# EAGLE board Controller-Board_Rack-PDU_1.0 (EAGLE 9.6.2), part 1 of 2
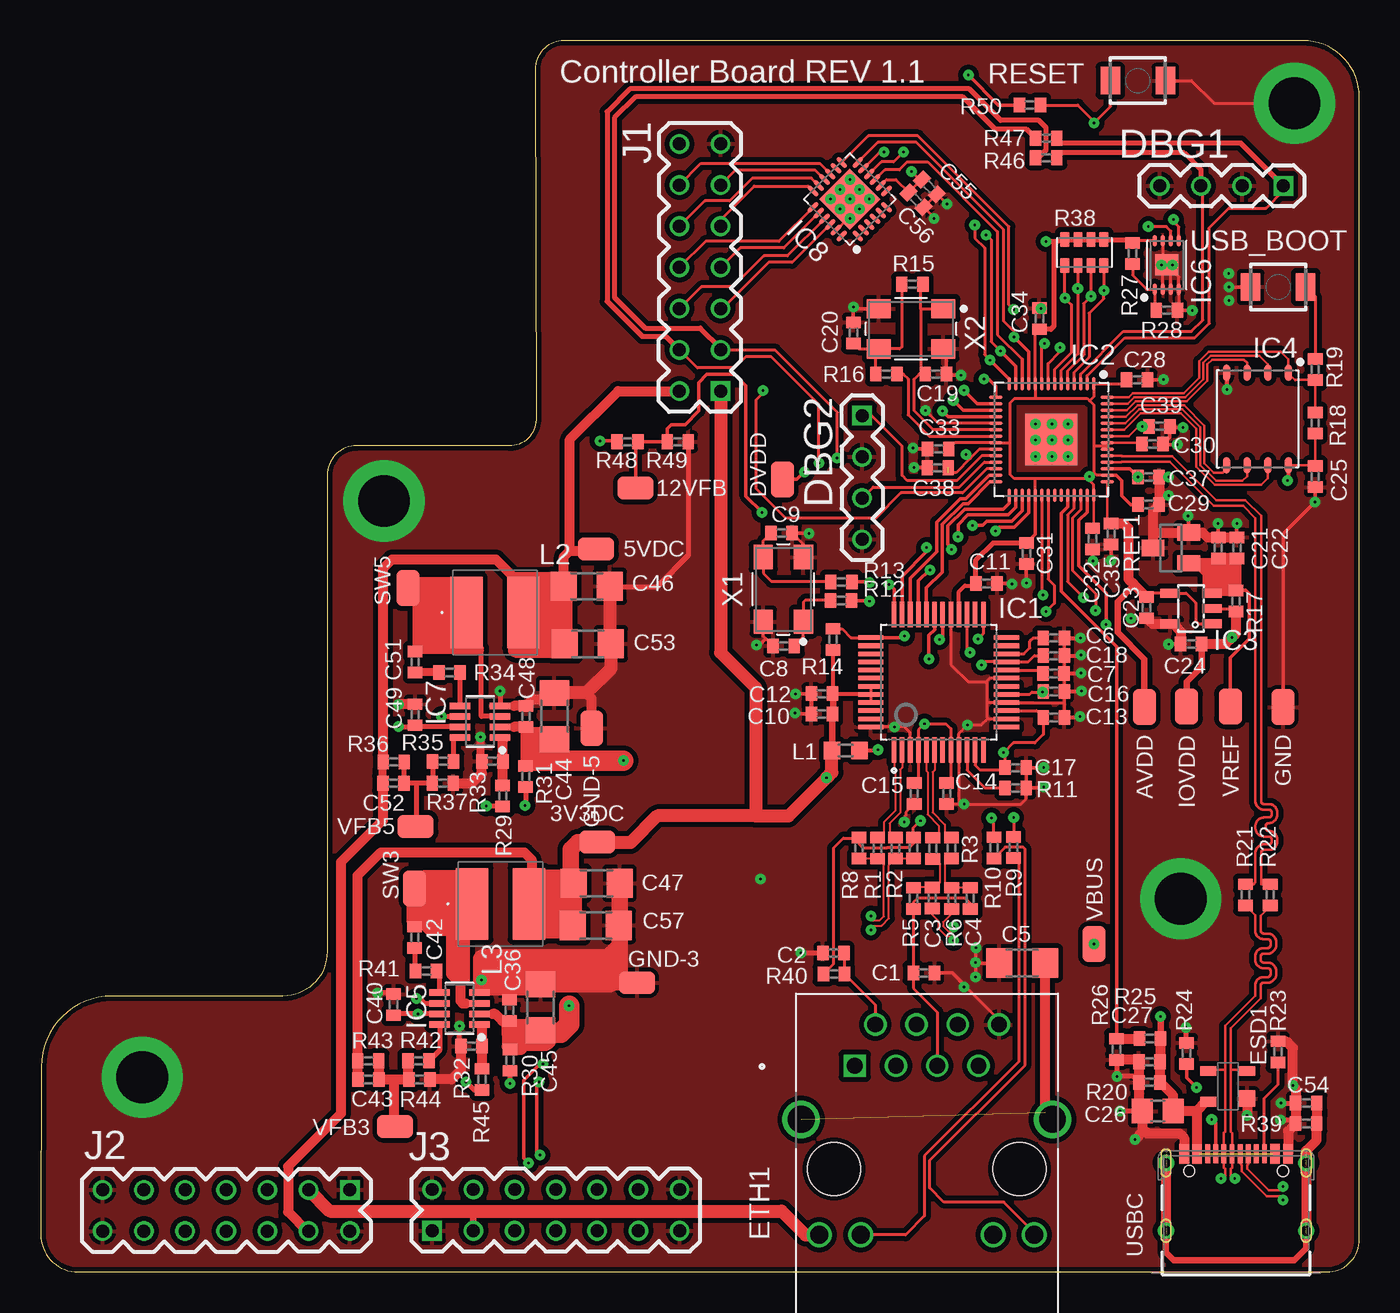
[diagram p0: board, top side]
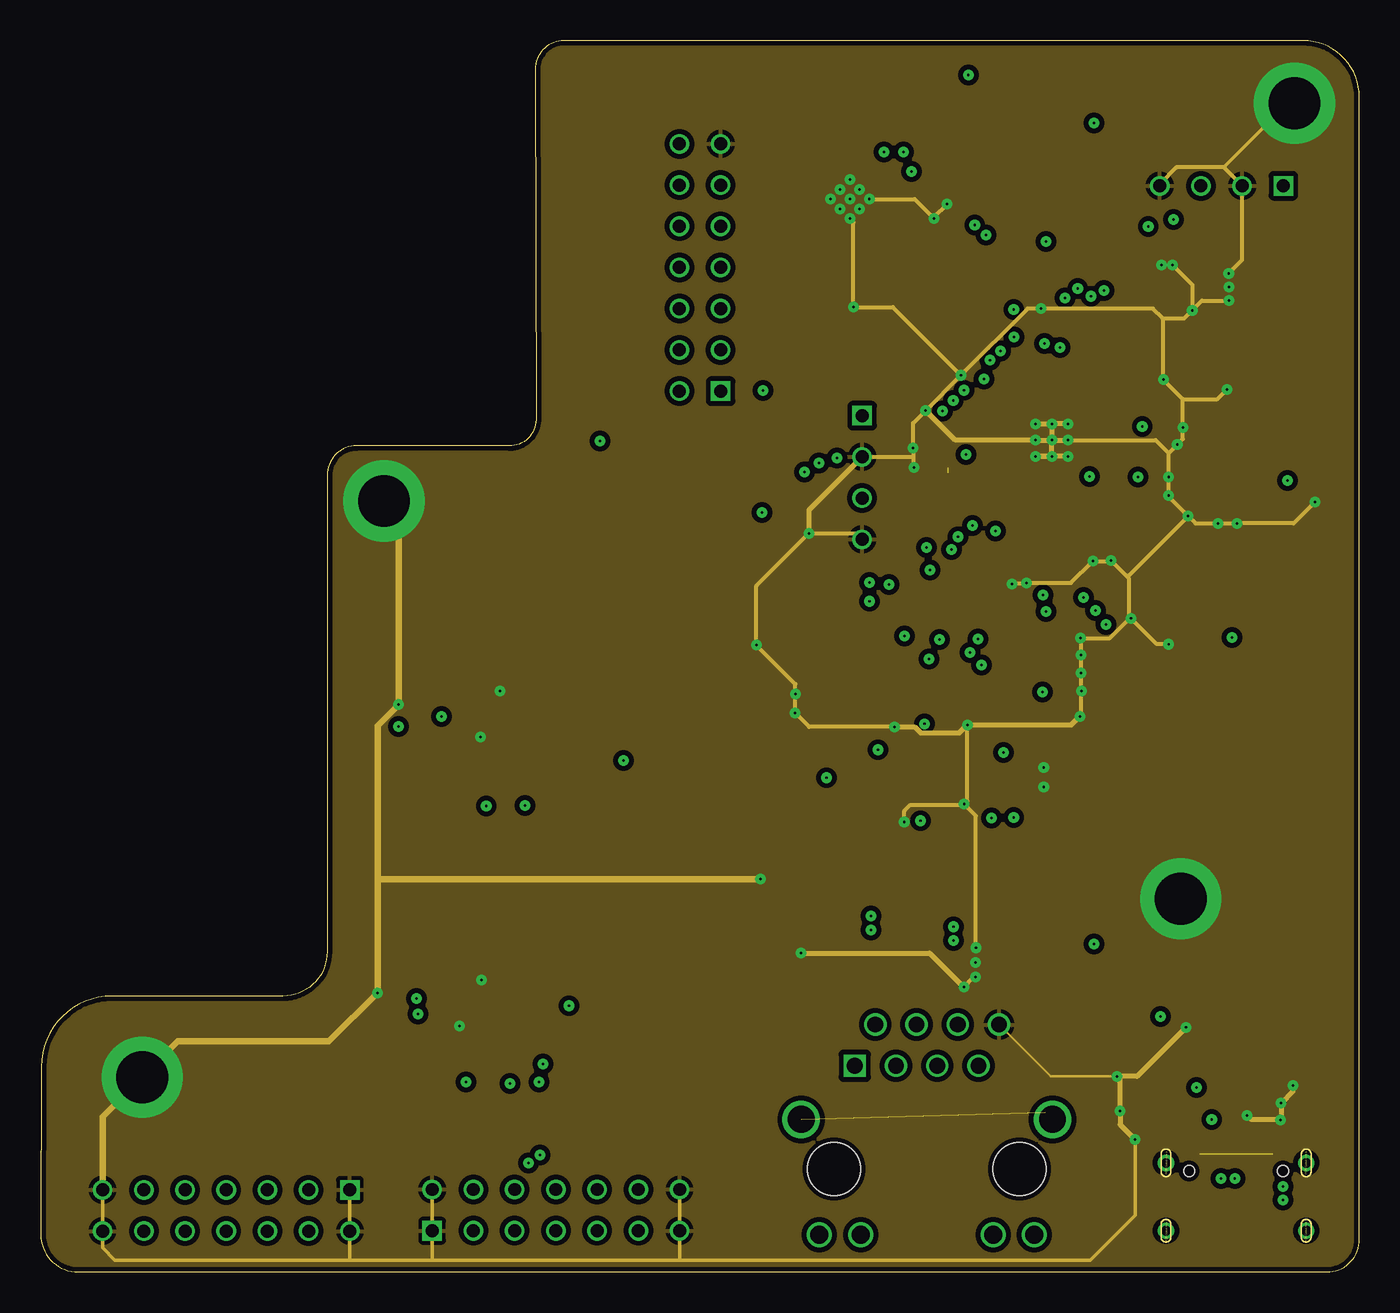
[diagram p1: board, inner layer Route2]
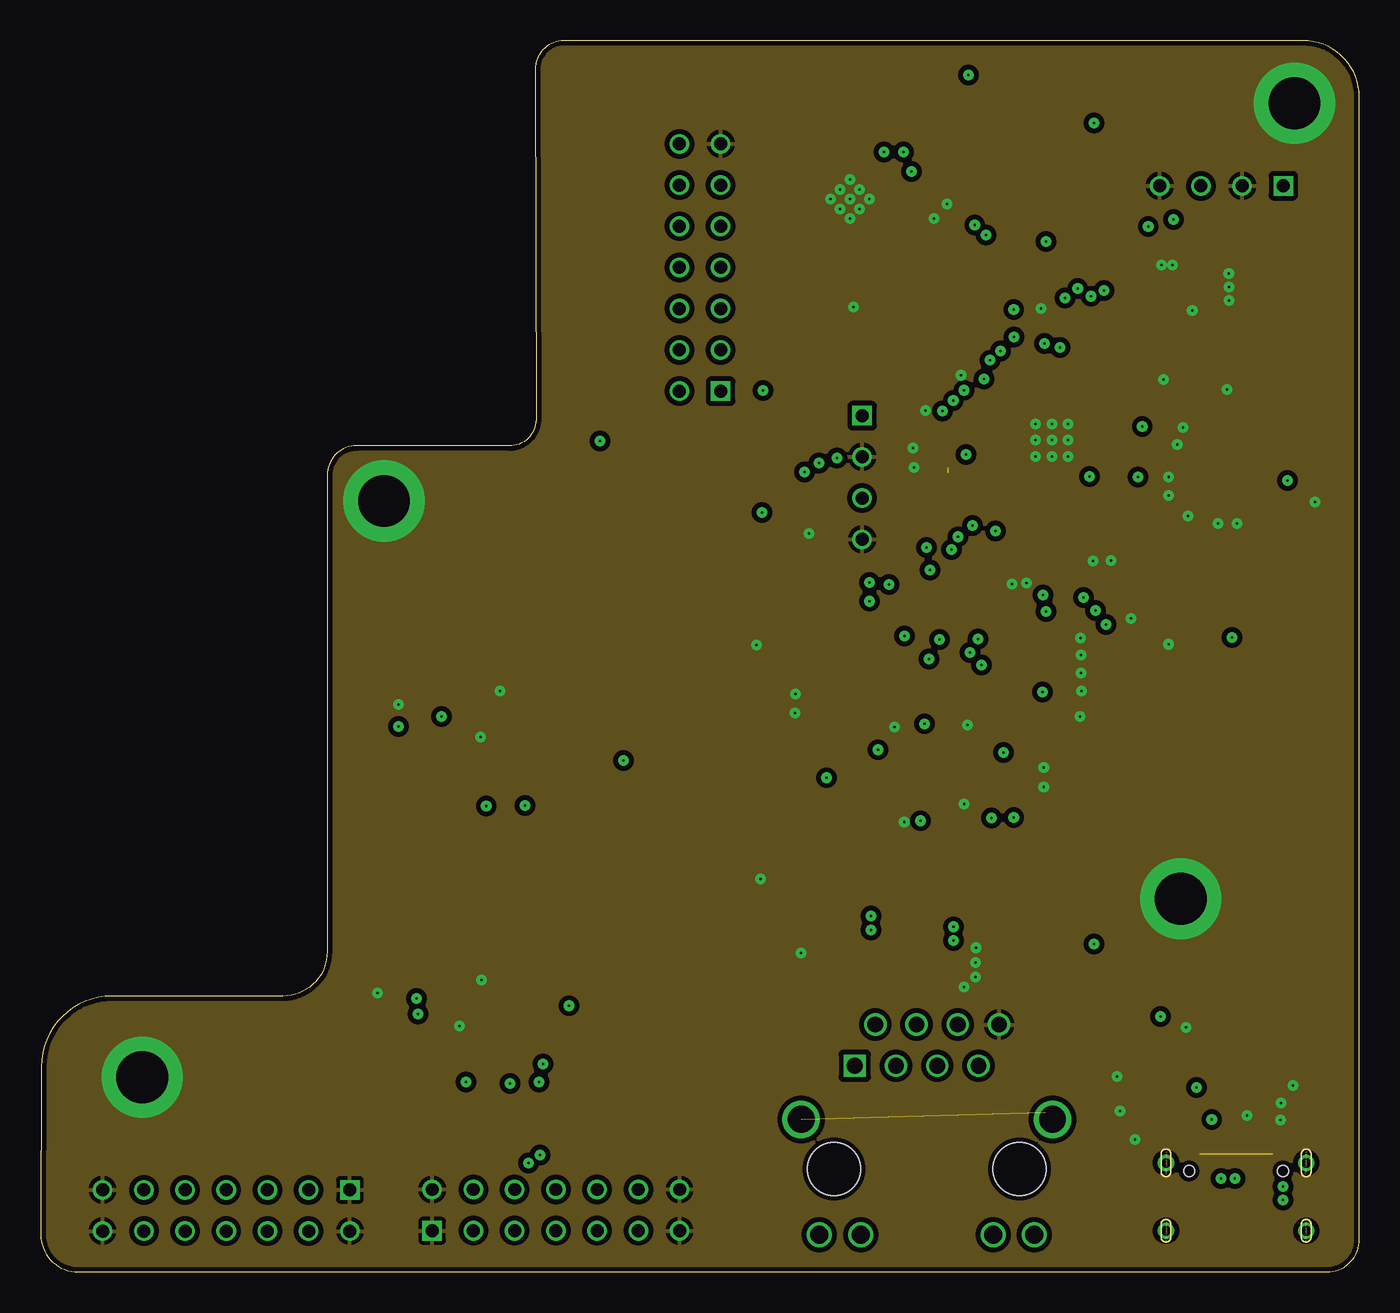
[diagram p2: board, inner layer Route15]
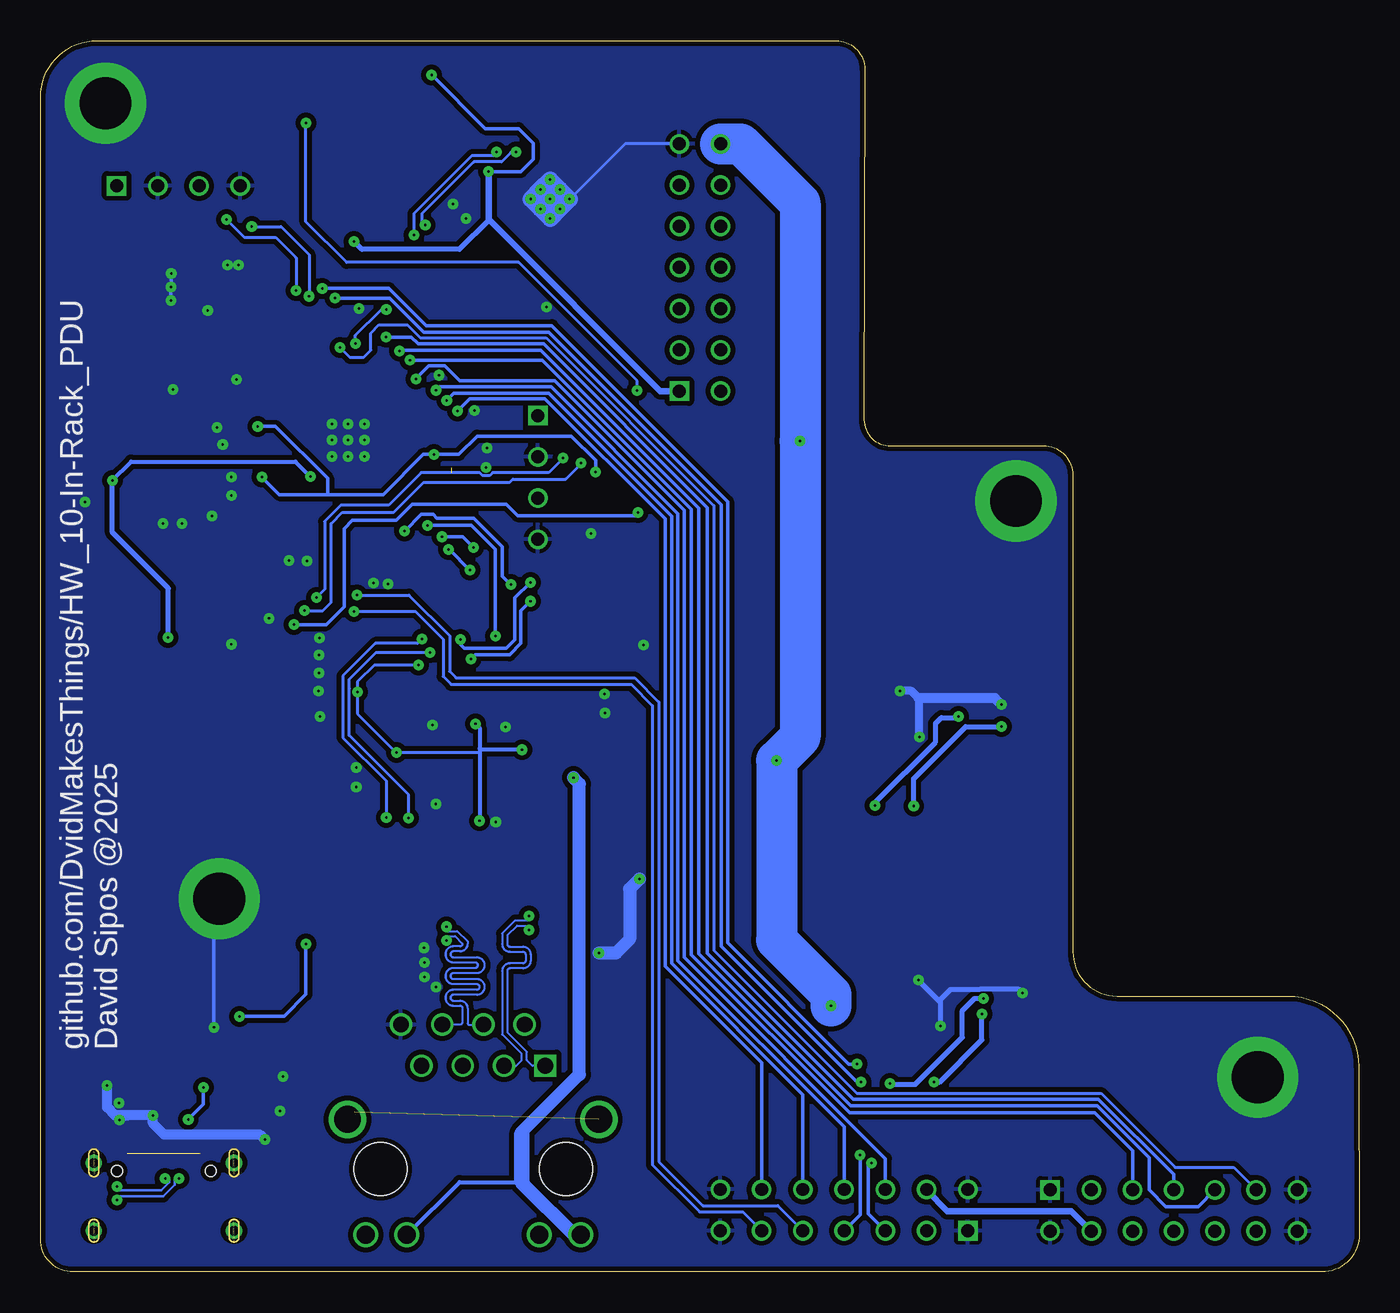
[diagram p3: board, bottom side, seen from below]

Size 81.26 x 75.87 mm. Coordinates in mm from the lower left corner, seen from the top.
Outline: 19.46,50.9 arc90 17.66,49.09 17.66,19.73 arc-90 14.93,17 4.41,17 arc90 0.05,12.65 0.01,2.31 0,2.31 arc90 2.31,0 79.26,0 arc90 81.26,2 81.26,72.39 arc90 77.78,75.87 32.24,75.87 arc90 30.48,74.11 30.53,52.5 arc-90 28.88,50.9 19.46,50.9
Copper layers (1+2*15+16): Top 0.035mm / dielectric 0.15mm / Route2 0.0175mm / dielectric 1.265mm / Route15 0.0175mm / dielectric 0.15mm / Bottom 0.035mm
Design rules "4layers *": minimum track width 3.5mil, minimum drill 0.15mm, track to track 3.5mil, track to pad 3.5mil, pad to pad 3.5mil, via to via 3.5mil, smd to smd 3.5mil, copper to edge 0.2mm, drill to drill 6mil, minimum pad ring 8mil, minimum via ring 0.25mm, stop-mask expansion 0.05mm, vias tented up to drill 16mil, thermal gap 10mil
Net classes: 1 100R_DIFFPAIR: width 0.121 mm, drill 0.15 mm, clearance 0.191 mm; 2 90R_DIFFPAIR: width 0.155 mm, drill 0.15 mm, clearance 0.191 mm

## Footprints (pad centres in the part's own frame; a part is rotated, then mirrored left to right if it is on the bottom)
TP = smd 2.2 x 1.4: TP 0,0
C0402 = smd 0.7 x 0.9: 1 -0.65,0; 2 0.65,0
C1206 = smd 1.6 x 1.803: 1 -1.422,0; 2 1.422,0
0805 = smd 1.3 x 1.5: 1 -0.95,0; 2 0.95,0
0402 = smd 0.7 x 0.9: 1 -0.65,0; 2 0.65,0
1X4 = drill 0.8 square: 1 0,3.81 | drill 0.8: 2 0,1.27; 3 0,-1.27; 4 0,-3.81
SOT143 = smd 1 x 1: 1 -0.75,-1.2 | smd 0.6 x 1: 2 0.95,-1.2; 3 0.95,1.2; 4 -0.95,1.2
RJ45-CAT5 = drill 0.97 square: 1 -4.445,6.35 | drill 0.97: 2 -3.175,8.89; 3 -1.905,6.35; 4 -0.635,8.89; 5 0.635,6.35; 6 1.905,8.89; 7 3.175,6.35; 8 4.445,8.89 | drill 1.1: 9 -6.625,-4.06; 10 -4.085,-4.06; 11 4.085,-4.06; 12 6.625,-4.06 | drill 1.65: S1 -7.745,3.05; S2 7.745,3.05 | hole 3.25: 5.715,0; -5.715,0
LQFP48 = smd 1.56 x 0.28: 1 -4.18,2.75; 2 -4.18,2.25; 3 -4.18,1.75; 4 -4.18,1.25; 5 -4.18,0.75; 6 -4.18,0.25; 7 -4.18,-0.25; 8 -4.18,-0.75; 9 -4.18,-1.25; 10 -4.18,-1.75; 11 -4.18,-2.25; 12 -4.18,-2.75; 25 4.18,-2.75; 26 4.18,-2.25; 27 4.18,-1.75; 28 4.18,-1.25; 29 4.18,-0.75; 30 4.18,-0.25; 31 4.18,0.25; 32 4.18,0.75; 33 4.18,1.25; 34 4.18,1.75; 35 4.18,2.25; 36 4.18,2.75 | smd 0.28 x 1.56: 13 -2.75,-4.18; 14 -2.25,-4.18; 15 -1.75,-4.18; 16 -1.25,-4.18; 17 -0.75,-4.18; 18 -0.25,-4.18; 19 0.25,-4.18; 20 0.75,-4.18; 21 1.25,-4.18; 22 1.75,-4.18; 23 2.25,-4.18; 24 2.75,-4.18; 37 2.75,4.18; 38 2.25,4.18; 39 1.75,4.18; 40 1.25,4.18; 41 0.75,4.18; 42 0.25,4.18; 43 -0.25,4.18; 44 -0.75,4.18; 45 -1.25,4.18; 46 -1.75,4.18; 47 -2.25,4.18; 48 -2.75,4.18
QFN40P700X700X100-57T510 = smd 0.837 x 0.22: 1 -3.437,2.6; 2 -3.437,2.2; 3 -3.437,1.8; 4 -3.437,1.4; 5 -3.437,1; 6 -3.437,0.6; 7 -3.437,0.2; 8 -3.437,-0.2; 9 -3.437,-0.6; 10 -3.437,-1; 11 -3.437,-1.4; 12 -3.437,-1.8; 13 -3.437,-2.2; 14 -3.437,-2.6; 29 3.437,-2.6; 30 3.437,-2.2; 31 3.437,-1.8; 32 3.437,-1.4; 33 3.437,-1; 34 3.437,-0.6; 35 3.437,-0.2; 36 3.437,0.2; 37 3.437,0.6; 38 3.437,1; 39 3.437,1.4; 40 3.437,1.8; 41 3.437,2.2; 42 3.437,2.6 | smd 0.22 x 0.837: 15 -2.6,-3.437; 16 -2.2,-3.437; 17 -1.8,-3.437; 18 -1.4,-3.437; 19 -1,-3.437; 20 -0.6,-3.437; 21 -0.2,-3.437; 22 0.2,-3.437; 23 0.6,-3.437; 24 1,-3.437; 25 1.4,-3.437; 26 1.8,-3.437; 27 2.2,-3.437; 28 2.6,-3.437; 43 2.6,3.437; 44 2.2,3.437; 45 1.8,3.437; 46 1.4,3.437; 47 1,3.437; 48 0.6,3.437; 49 0.2,3.437; 50 -0.2,3.437; 51 -0.6,3.437; 52 -1,3.437; 53 -1.4,3.437; 54 -1.8,3.437; 55 -2.2,3.437; 56 -2.6,3.437 | smd 3.2 x 3.2: 57 0,0
SOT23-5 = smd 0.55 x 1.2: 1 -0.95,-1.3; 2 0,-1.3; 3 0.95,-1.3; 4 0.95,1.3; 5 -0.95,1.3
SON127P600X500X75-8N = smd 1.012 x 0.432: 1 -2.85,1.905; 2 -2.85,0.635; 3 -2.85,-0.635; 4 -2.85,-1.905; 5 2.85,-1.905; 6 2.85,-0.635; 7 2.85,0.635; 8 2.85,1.905
SOT65P280X110-8N = smd 1.259 x 0.4: 1 -1.228,0.975; 2 -1.228,0.325; 3 -1.228,-0.325; 4 -1.228,-0.975; 5 1.228,-0.975; 6 1.228,-0.325; 7 1.228,0.325; 8 1.228,0.975
SON50P300X200X50-9T130X140N = smd 0.711 x 0.27: 1 -1.501,0.75; 2 -1.501,0.25; 3 -1.501,-0.25; 4 -1.501,-0.75; 5 1.501,-0.75; 6 1.501,-0.25; 7 1.501,0.25; 8 1.501,0.75 | smd 1.3 x 1.4: 9 0,0
QFN50P400X400X100-25T265 = smd 0.811 x 0.264: 1 -1.951,1.25; 2 -1.951,0.75; 3 -1.951,0.25; 4 -1.951,-0.25; 5 -1.951,-0.75; 6 -1.951,-1.25; 13 1.951,-1.25; 14 1.951,-0.75; 15 1.951,-0.25; 16 1.951,0.25; 17 1.951,0.75; 18 1.951,1.25 | smd 0.264 x 0.811: 7 -1.25,-1.951; 8 -0.75,-1.951; 9 -0.25,-1.951; 10 0.25,-1.951; 11 0.75,-1.951; 12 1.25,-1.951; 19 1.25,1.951; 20 0.75,1.951; 21 0.25,1.951; 22 -0.25,1.951; 23 -0.75,1.951; 24 -1.25,1.951 | smd 2.65 x 2.65: 25 0,0
2X7 = drill 0.8 square: 1 -1.27,7.62 | drill 0.8: 2 1.27,7.62; 3 -1.27,5.08; 4 1.27,5.08; 5 -1.27,2.54; 6 1.27,2.54; 7 -1.27,0; 8 1.27,0; 9 -1.27,-2.54; 10 1.27,-2.54; 11 -1.27,-5.08; 12 1.27,-5.08; 13 -1.27,-7.62; 14 1.27,-7.62
0603 = smd 1 x 1.1: 1 -0.85,0; 2 0.85,0
SRR5228A = smd 4.4 x 2: 1 0,1.75; 2 0,-1.75
742C083103JP = smd 0.59 x 0.92: 1 -1.2,-0.8; 2 -0.4,-0.8; 3 0.4,-0.8; 4 1.2,-0.8; 5 1.2,0.8; 6 0.4,0.8; 7 -0.4,0.8; 8 -1.2,0.8
SOT23 = smd 1 x 1.4: 1 -0.95,-1.1; 2 0.95,-1.1; 3 0,1.1
SWITCH-OMRON_B3U-1000P = smd 1.2 x 1.7: 1 -1.7,0; 2 1.7,0
629722000214 = smd 0.3 x 1.15: A1 -3.35,4.745; A4 -2.55,4.745; A5 -1.25,4.745; A6 -0.25,4.745; A7 0.25,4.745; A8 1.25,4.745; A9 2.55,4.745; A12 3.35,4.745; B1 3.05,4.745; B4 2.25,4.745; B5 1.75,4.745; B6 0.75,4.745; B7 -0.75,4.745; B8 -1.75,4.745; B9 -2.25,4.745; B12 -3.05,4.745 | drill 0.6 pad 1: S1 -4.32,4.18; S2 4.32,4.18; S3 -4.32,0; S4 4.32,0 | hole 0.65: -2.89,3.68; 2.89,3.68
OSCCC500X320X130 = smd 1.487 x 1.187: 1 -1.988,-1.238; 2 1.988,-1.238; 3 1.988,1.238; 4 -1.988,1.238

## Placement (x,y rotation side)
3V3DC  TP  [TP]  34.3,26.49 180 top
5VDC  TP  [TP]  34.23,44.55 0 top
12VFB  TP  [TP]  36.66,48.3 0 top
AVDD  TP  [TP]  68.01,34.81 270 top
C1  100nF  [C0402]  54.43,18.42 0 top
C2  22nF  [C0402]  48.85,19.64 180 top
C3  6.8nF  [C0402]  54.94,23.04 270 top
C4  6.8nF  [C0402]  56.14,23.02 270 top
C5  C1206C102KGRACTM  [C1206]  60.48,19.03 0 top
C6  100nF  [C0402]  62.43,39.07 0 top
C7  4.7uF  [C0402]  62.41,36.88 0 top
C8  18pF  [C0402]  45.78,38.57 180 top
C9  18pF  [C0402]  45.65,45.53 0 top
C10  100nF  [C0402]  48.14,34.38 180 top
C11  100nF  [C0402]  58.28,42.42 0 top
C12  100nF  [C0402]  48.14,35.63 180 top
C13  100nF  [C0402]  62.43,34.17 0 top
C14  100nF  [C0402]  55.83,29.48 270 top
C15  100nF  [C0402]  53.83,29.48 270 top
C16  100nF  [C0402]  62.43,35.77 0 top
C17  100nF  [C0402]  60.08,31.07 0 top
C18  100nF  [C0402]  62.43,37.97 0 top
C19  15pF  [C0402]  55.16,55.32 0 top
C20  15pF  [C0402]  50.08,57.86 90 top
C21  1uF  [C0402]  72.57,44.61 90 top
C22  100nF  [C0402]  73.71,44.61 90 top
C23  100nF  [C0402]  68.15,40.93 270 top
C24  100nF  [C0402]  70.89,38.69 180 top
C25  100nF  [C0402]  78.54,49 270 top
C26  10uF  [0805]  68.83,9.91 180 top
C27  100nF  [0402]  68.33,12.95 180 top
C28  100nF  [C0402]  67.56,54.97 0 top
C29  100nF  [C0402]  68.27,47.28 0 top
C30  100nF  [C0402]  68.5,51.01 0 top
C31  100nF  [C0402]  60.74,44.27 270 top
C32  100nF  [C0402]  64.82,45.17 270 top
C33  100nF  [C0402]  55.3,50.72 180 top
C34  100nF  [C0402]  61.54,58.73 90 top
C35  100nF  [C0402]  65.96,45.47 270 top
C36  100nF  [0402]  28.9,16.12 90 top
C37  100nF  [C0402]  68.27,48.98 0 top
C38  100nF  [C0402]  55.28,49.55 180 top
C39  100nF  [C0402]  68.93,52.1 0 top
C40  100nF  [0402]  21.75,16.47 90 top
C42  100nF  [0402]  23.05,20.62 90 top
C43  33pF  [0402]  20.2,11.86 0 top
C44  CL31A226KAHNNNE - 22uF 25V  [C1206]  31.66,34.25 90 top
C45  CL31A226KAHNNNE - 22uF 25V  [C1206]  30.81,16.3 90 top
C46  CL31A226KPHNNNE - 22uF - 10V  [C1206]  33.66,42.25 0 top
C47  CL31A226KPHNNNE - 22uF - 10V  [C1206]  34.26,23.95 0 top
C48  100nF  [0402]  29.91,34.23 90 top
C49  100nF  [0402]  23.08,34.33 90 top
C51  100nF  [0402]  23.08,37.58 90 top
C52  33pF  [0402]  21.74,30.11 0 top
C53  CL31A226KPHNNNE - 22uF - 10V  [C1206]  33.71,38.7 0 top
C54  4.7nF  [0402]  77.98,10.41 180 top
C55  100nF  [C0402]  54.76,66.86 315 top
C56  100nF  [C0402]  53.94,66.06 315 top
C57  CL31A226KPHNNNE - 22uF - 10V  [C1206]  34.21,21.35 0 top
DBG1  [1X4]  72.77,66.92 270 top
DBG2  [1X4]  50.62,48.95 0 top
DVDD  TP  [TP]  45.71,48.83 90 top
ESD1  SP0503BAHTG-ES  [SOT143]  73.15,11.43 90 top
ETH1  SI-60118-F  [RJ45-CAT5]  54.61,6.35 0 top
GND  TP  [TP]  76.56,34.8 270 top
GND-3  TP  [TP]  36.75,17.82 180 top
GND-5  TP  [TP]  33.96,33.5 270 top
IC1  W5500  [LQFP48]  55.33,36.33 90 top
IC2  RP2040  [QFN40P700X700X100-57T510]  62.28,51.29 270 top
IC3  MCP6001R  [SOT23-5]  70.89,40.88 90 top
IC4  W25Q128JVPIQ  [SON127P600X500X75-8N]  74.98,52.56 270 top
IC5  MP2315S  [SOT65P280X110-8N]  25.81,16.23 180 top
IC6  CAT24C256HU4IGT3  [SON50P300X200X50-9T130X140N]  69.39,62.05 90 top
IC7  MP2315GJ-Z  [SOT65P280X110-8N]  27.08,33.91 180 top
IC8  MCP23S18-E/MJ  [QFN50P400X400X100-25T265]  49.86,66.1 135 top
IOVDD  TP  [TP]  70.61,34.85 270 top
J1  [2X7]  40.63,61.89 180 top
J2  [2X7]  11.44,3.79 270 top
J3  [2X7]  31.75,3.81 90 top
L1  BLM18EG221TN1D  [0603]  49.61,32.13 0 top
L2  4.9uH  [SRR5228A]  27.99,40.63 90 top
L3  4.2uH  [SRR5228A]  28.34,22.68 90 top
R1  3.3R  [0402]  51.57,26.11 270 top
R2  3.3R  [0402]  52.67,26.11 270 top
R3  3.3R  [0402]  56.12,26.12 270 top
R4  3.3R  [0402]  54.97,26.1 270 top
R5  49.9R  [C0402]  53.78,23.02 90 top
R6  49.9R  [C0402]  57.28,23.02 90 top
R7  49.9R  [0402]  53.78,26.12 90 top
R8  49.9R  [0402]  50.43,26.12 90 top
R9  470R  [0402]  59.94,26.16 270 top
R10  470R  [0402]  58.74,26.14 270 top
R11  12.4K 1%  [0402]  60.08,29.82 180 top
R12  0R  [0402]  49.32,41.37 0 top
R13  1M  [0402]  49.34,42.52 0 top
R14  4.7K  [0402]  48.82,38.98 270 top
R15  0R  [0402]  53.71,60.85 180 top
R16  1K  [0402]  52.11,55.32 0 top
R17  4.7K  [0402]  73.66,41.33 270 top
R18  DNI  [0402]  78.54,52.31 270 top
R19  1K  [0402]  78.54,55.61 270 top
R20  2.2K 1%  [0402]  68.33,11.68 180 top
R21  27R  [0402]  74.24,23.24 90 top
R22  27R  [0402]  75.76,23.24 90 top
R23  5.1K  [0402]  76.25,13.56 90 top
R24  5.1K  [0402]  70.61,13.46 90 top
R25  10K  [0402]  68.35,14.38 180 top
R26  10K  [0402]  66.29,13.72 270 top
R27  4.7K  [0402]  67.28,62.76 90 top
R28  4.7K  [0402]  69.39,59.25 180 top
R29  100K  [0402]  28.47,29.33 90 top
R30  499K  [0402]  28.92,13.05 270 top
R31  499K  [0402]  29.89,30.53 270 top
R32  7.5K  [0402]  26.55,13.91 180 top
R33  9.09K  [0402]  27.84,31.46 180 top
R34  10R  [0402]  25.2,36.94 0 top
R35  20K  [0402]  24.8,31.46 180 top
R36  40.2K  [0402]  21.76,31.43 0 top
R37  7.5K  [0402]  24.78,30.11 0 top
R38  4D03WGJ0332T5E  [742C083103JP]  64.31,62.81 0 top
R39  1M  [0402]  77.98,9.14 180 top
R40  470R  [0402]  48.88,18.35 180 top
R41  10R  [0402]  23.75,18.54 0 top
R42  33K  [0402]  23.29,13.01 180 top
R43  40.2K  [0402]  20.19,13.01 0 top
R44  12.7K  [0402]  23.34,11.86 0 top
R45  100K  [0402]  27.2,11.87 90 top
R46  0R  [0402]  61.96,68.65 0 top
R47  0R  [0402]  61.96,69.85 0 top
R48  100K  [0402]  36.16,51.15 180 top
R49  10K  [0402]  39.26,51.15 180 top
R50  10K  [0402]  60.96,71.9 0 top
REF1  LM4040BXX  [SOT23]  69.65,44.61 90 top
RESET  B3U-1000P-B  [SWITCH-OMRON_B3U-1000P]  67.61,73.4 0 top
SW3  TP  [TP]  23.04,23.63 90 top
SW5  TP  [TP]  22.63,42.13 90 top
USB_BOOT  B3U-1000P-B  [SWITCH-OMRON_B3U-1000P]  76.25,60.69 180 top
USBC  USB-TYPE-C-018  [629722000214]  73.66,2.54 0 top
VBUS  TP  [TP]  64.91,20.21 90 top
VFB3  TP  [TP]  21.84,8.96 0 top
VFB5  TP  [TP]  23.11,27.45 180 top
VREF  TP  [TP]  73.31,34.85 270 top
X1  XC53M4-25.000-F18NJDTL  [OSCCC500X320X130]  45.76,42.06 90 top
X2  K5A1200015304P  [OSCCC500X320X130]  53.64,58.11 180 top

## Library data of the parts
3V3DC 5VDC 12VFB AVDD C1-C40 C42-C49 C51-C57 DVDD GND GND-3 GND-5 IOVDD L1-L3 R1-R37 R39-R50 SW3 SW5 VBUS VFB3 VFB5 VREF X1 X2 = ds_passive
DBG1 DBG2 J1-J3 = ds_con
ESD1 IC1 IC8 = ds_ic_peripherals
ETH1 = ds_con; MANUFACTURER: Bel Fuse; MAXIMUM_PACKAGE_HEIGHT: 15.21mm; PARTREV: A0; STANDARD: Manufacturer Recommendations
IC2 = ds_ic_mcu
IC3 = ds_ic_opa
IC4 = MCU
IC5 IC7 REF1 = ds_ic_vreg
IC6 = ds_ic_memory
R38 = Resistor Array; CREATED_BY: PCBLayout.com; DIGIKEY_PN: 742C083103JPTR-ND; MANUFACTURER: CTS Resistor Products; MPN: 742C083103JP; PACKAGE: 1206
RESET USB_BOOT = 52101-101-REV-A_v16
USBC = Wurth_Connectors_WR-USB; APPLICATION: USB 2.0; DATASHEET-URL: https://www.we-online.com/redexpert/spec/629722000214?ae; GERDER: Receptacle; INTERFACE-TYPE: Type C; IR: 5A; MOUNT: SMT; PACKAGING: Tape and Reel; PART-NUMBER: 629722000214; PINS: 16; TYPE: Horizontal; WORKING-VOLTAGE: 20V(AC)

## Nets
!ACT: IC1.27 R10.1
!INT: IC1.36 IC2.32
!LINK: IC1.25 R9.1
!QSPI_SS: IC2.56 IC4.1 R18.1 R19.2
!RST: IC1.37 IC2.31 R14.1
!SPI0_CS: IC1.32 IC2.28
!SPI1_CS: IC2.12 IC8.9
!SPI1_CS_S: IC2.8 J2.11
+1V1: C37.1 C38.1 C39.1 DVDD.TP IC2.23 IC2.45 IC2.50
+3V3: 3V3DC.TP C10.1 C11.1 C12.1 C24.1 C25.1 C28.1 C29.1 C30.1 C31.1 C32.1 C33.1 C34.1 C43.1 C47.1 C55.1 C56.1 C57.1 ETH1.9 ETH1.11 IC1.28 IC1.43 IC1.44 IC1.45 IC2.1 IC2.10 IC2.22 IC2.33 IC2.42 IC2.44 IC2.48 IC2.49 IC3.2 IC4.8 IC6.8 IC8.8 IOVDD.TP J1.1 J2.3 J3.3 L1.1 L3.2 R14.2 R17.2 R18.2 R27.2 R38.5 R38.6 R38.7 R38.8 R43.1 R50.1
+3V3_A: C13.1 C14.1 C15.1 C16.1 C17.1 C18.1 IC1.4 IC1.8 IC1.11 IC1.15 IC1.17 IC1.21 L1.2 R7.2 R8.2 R40.2
+5V: 5VDC.TP C46.1 C52.1 C53.1 J1.2 J2.4 J3.4 L2.2 R36.1
+12V: C36.1 C44.1 C45.1 C48.1 IC5.2 IC7.2 J1.14 R30.1 R31.1 R48.2
AVDD: AVDD.TP C23.1 C35.1 IC2.43 IC3.1 IC3.4
CC1: R24.1 USBC.A5
CC2: R23.1 USBC.B5
CHASSIS: C5.2 ETH1.S1 ETH1.S2
DIO_RESET: IC2.9 IC8.13
DP_N [90R_DIFFPAIR]: ESD1.3 R21.1 USBC.A7 USBC.B7
DP_P [90R_DIFFPAIR]: ESD1.2 R22.1 USBC.A6 USBC.B6
DSP_RES: IC2.34 J3.9
EXP_RST: IC2.35 J3.11
GND: C1.2 C2.2 C5.1 C6.2 C7.2 C8.2 C9.2 C10.2 C11.2 C12.2 C13.2 C14.2 C15.2 C16.2 C17.2 C18.2 C19.2 C20.2 C21.2 C22.2 C23.2 C24.2 C25.2 C26.2 C27.2 C28.2 C29.2 C30.2 C31.2 C32.2 C33.2 C34.2 C35.2 C36.2 C37.2 C38.2 C39.2 C40.2 C44.2 C45.2 C46.2 C47.2 C48.2 C49.2 C53.2 C54.2 C55.2 C56.2 C57.2 DBG1.2 DBG1.4 DBG2.2 DBG2.4 ESD1.1 ETH1.8 GND-3.TP GND-5.TP GND.TP IC1.3 IC1.9 IC1.14 IC1.16 IC1.19 IC1.29 IC1.48 IC2.19 IC2.57 IC3.5 IC4.4 IC5.4 IC6.2 IC6.3 IC6.4 IC6.7 IC6.9 IC7.4 IC8.23 IC8.25 J1.13 J2.1 J2.2 J2.13 J2.14 J3.1 J3.2 J3.13 J3.14 R11.1 R20.2 R23.2 R24.2 R26.2 R28.1 R32.2 R33.2 R37.2 R39.2 R44.2 R49.1 REF1.2 REF1.3 RESET.2 USB_BOOT.2 USBC.A1 USBC.A12 USBC.B1 USBC.B12 X1.2 X1.4 X2.2 X2.4
I2C0_SCL: IC2.7 J3.7 R38.1
I2C0_SDA: IC2.6 J3.5 R38.2
I2C1_SCL: IC2.5 IC6.6 R38.3
I2C1_SDA: IC2.4 IC6.5 R38.4
I_MEA/TX: IC2.40 J1.4 R46.1
KEY_0: IC2.15 J3.6
KEY_1: IC2.16 J3.8
KEY_2: IC2.17 J3.10
KEY_3: IC2.18 J3.12
N$1: IC1.10 R11.2
N$2: ETH1.10 R9.2
N$3: ETH1.12 R10.2
N$4: C6.1 IC1.22
N$5: C7.1 IC1.20
N$6: C8.1 R12.1 X1.1
N$7: C9.1 R13.1 X1.3
N$8: IC1.31 R12.2
N$9: IC1.30 R13.2
N$11: IC5.5 R41.2
N$12: IC5.1 R32.1 R45.2
N$13: IC7.1 R29.2 R33.1
N$14: C20.1 R15.2 R16.1 X2.3
N$15: IC7.6 R31.2
N$16: C49.1 IC7.7 R29.1
N$17: IC2.26 R50.2 RESET.1
N$20: IC5.8 R42.1
N$21: C42.2 IC5.3 L3.1 SW3.TP
N$22: C42.1 R41.1
N$23: IC6.1 R27.1 R28.2
N$24: C43.2 R42.2 R43.2 R44.1 VFB3.TP
N$26: IC5.6 R30.2
N$31: C40.1 IC5.7 R45.1
N$33: IC7.5 R34.2
N$34: IC7.8 R35.1
N$35: C51.2 IC7.3 L2.1 SW5.TP
N$36: C51.1 R34.1
N$37: C52.2 R35.2 R36.2 R37.1 VFB5.TP
PWR_DETECT: 12VFB.TP IC2.41 R48.1 R49.2
QSPI_SCLK: IC2.52 IC4.6
QSPI_SD0: IC2.53 IC4.5
QSPI_SD1: IC2.55 IC4.2
QSPI_SD2: IC2.54 IC4.3
QSPI_SD3: IC2.51 IC4.7
RCT: C1.1 ETH1.5 R5.1 R6.1
RD_N [100R_DIFFPAIR]: C3.2 ETH1.6
RD_P [100R_DIFFPAIR]: C4.2 ETH1.4
RDC_RD_N [100R_DIFFPAIR]: C3.1 R4.2 R5.2
RDC_RD_P [100R_DIFFPAIR]: C4.1 R3.2 R6.2
REL_0: IC8.15 J1.12
REL_1: IC8.16 J1.11
REL_2: IC8.17 J1.10
REL_3: IC8.18 J1.9
REL_4: IC8.19 J1.8
REL_5: IC8.20 J1.7
REL_6: IC8.21 J1.6
REL_7: IC8.22 J1.5
RP_XI: C19.1 IC2.20 R15.1 X2.1
RP_XO: IC2.21 R16.2
RX_RD_N [100R_DIFFPAIR]: IC1.5 R4.1
RX_RD_P [100R_DIFFPAIR]: IC1.6 R3.1
SPI0_MISO: IC1.34 IC2.27
SPI0_MOSI: IC1.35 IC2.30
SPI0_SCK: IC1.33 IC2.29
SPI1_MISO: IC2.11 IC8.12 J2.7
SPI1_MOSI: IC2.14 IC8.11 J2.5
SPI1_SCK: IC2.13 IC8.10 J2.9
SWCLK: DBG2.1 IC2.24
SWDIO: DBG2.3 IC2.25
TCT: C2.1 ETH1.2 R40.1
TD_N [100R_DIFFPAIR]: ETH1.3 R1.2 R8.1
TD_P [100R_DIFFPAIR]: ETH1.1 R2.2 R7.1
TX_TD_N [100R_DIFFPAIR]: IC1.1 R1.1
TX_TD_P [100R_DIFFPAIR]: IC1.2 R2.1
UART0_RX: DBG1.1 IC2.2 R47.2
UART0_TX: DBG1.3 IC2.3 R46.2
USB_BOOT: R19.1 USB_BOOT.1
USB_DP_N [90R_DIFFPAIR]: IC2.46 R21.2
USB_DP_P [90R_DIFFPAIR]: IC2.47 R22.2
USB_SHIELD: C54.1 R39.1 USBC.S1 USBC.S2 USBC.S3 USBC.S4
V_MEA/RX: IC2.39 J1.3 R47.1
V_USB: IC2.38 R25.2 R26.1
VBUS: C26.1 C27.1 ESD1.4 R20.1 R25.1 USBC.A4 USBC.A9 USBC.B4 USBC.B9 VBUS.TP
VREF: C21.1 C22.1 IC3.3 R17.1 REF1.1 VREF.TP